# EAGLE board Sensorenschakeling_PCB (EAGLE 9.7.0)
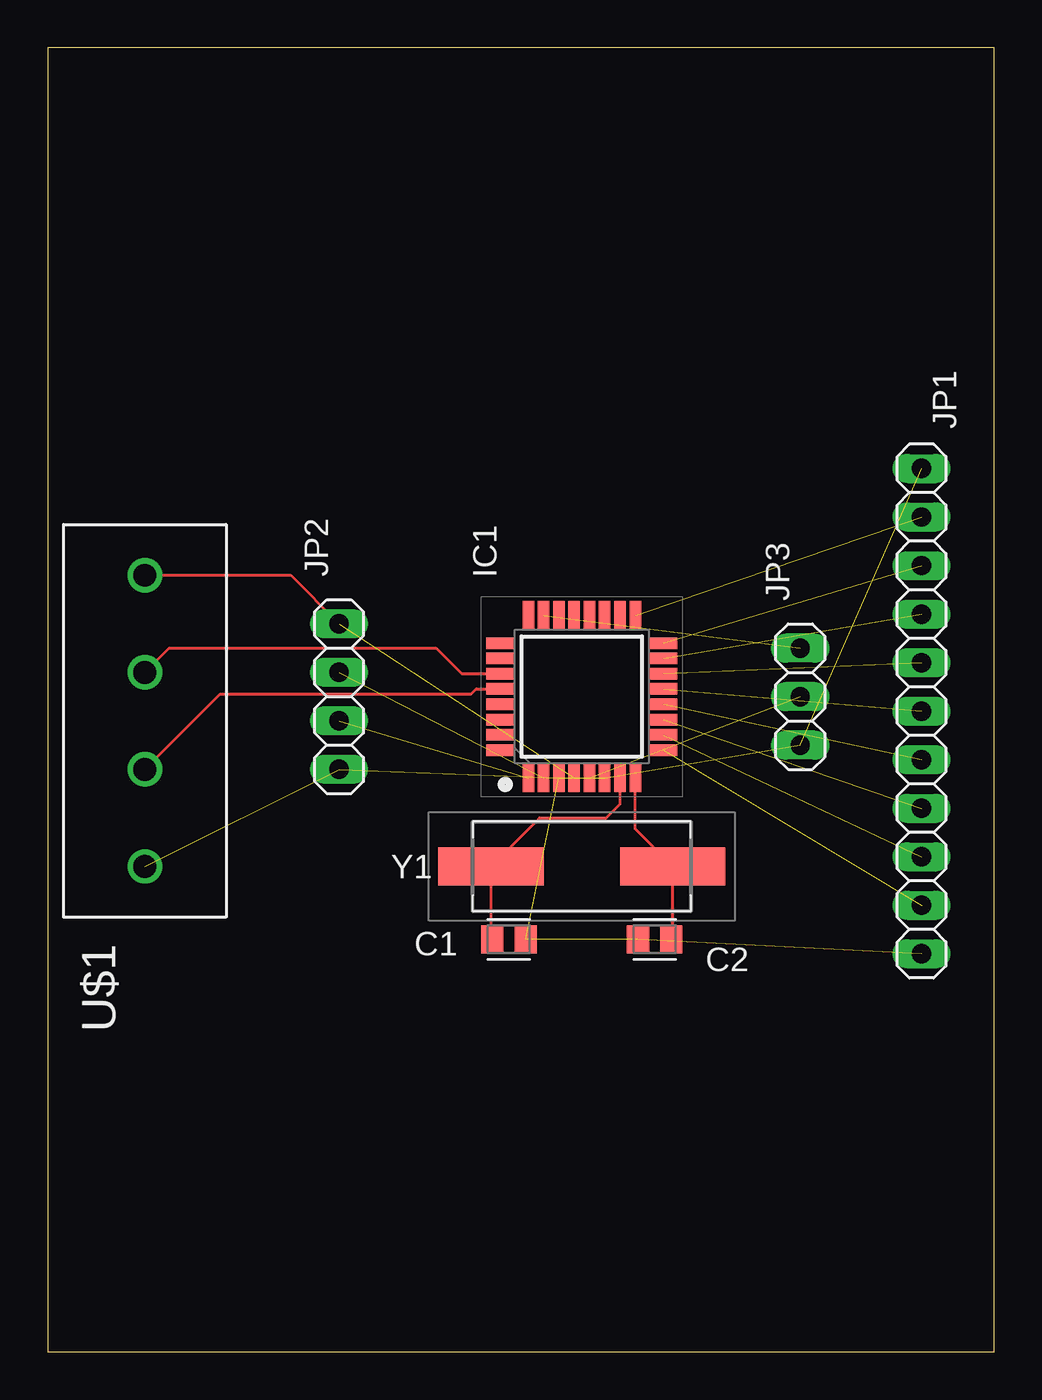
[diagram p0: board, top side]

Size 49.51 x 68.25 mm. Coordinates in mm from the lower left corner, seen from the top.
Outline: 0,0 49.51,0 49.51,68.25 0,68.25 0,0
Copper layers (1*16): Top 0.035mm / dielectric 1.5mm / Bottom 0.035mm
Design rules "default": minimum track width 6mil, minimum drill 0.35mm, track to track 6mil, track to pad 6mil, pad to pad 6mil, via to via 6mil, smd to smd 6mil, copper to edge 40mil, drill to drill 6mil, minimum pad ring 10mil, minimum via ring 8mil, stop-mask expansion 4mil, vias tented up to drill 0mil, thermal gap 10mil

## Footprints (pad centres in the part's own frame; a part is rotated, then mirrored left to right if it is on the bottom)
CAPC2012X110 = smd 1.165 x 1.465: 1 -0.875,0; 2 0.875,0
QFP80P900X900X120-32N = smd 1.5 x 0.6: 1 -4.25,2.8; 2 -4.25,2; 3 -4.25,1.2; 4 -4.25,0.4; 5 -4.25,-0.4; 6 -4.25,-1.2; 7 -4.25,-2; 8 -4.25,-2.8; 17 4.25,-2.8; 18 4.25,-2; 19 4.25,-1.2; 20 4.25,-0.4; 21 4.25,0.4; 22 4.25,1.2; 23 4.25,2; 24 4.25,2.8 | smd 0.6 x 1.5: 9 -2.8,-4.25; 10 -2,-4.25; 11 -1.2,-4.25; 12 -0.4,-4.25; 13 0.4,-4.25; 14 1.2,-4.25; 15 2,-4.25; 16 2.8,-4.25; 25 2.8,4.25; 26 2,4.25; 27 1.2,4.25; 28 0.4,4.25; 29 -0.4,4.25; 30 -1.2,4.25; 31 -2,4.25; 32 -2.8,4.25
1X11 = drill 1.016 long: 1 -12.7,0; 2 -10.16,0; 3 -7.62,0; 4 -5.08,0; 5 -2.54,0; 6 0,0; 7 2.54,0; 8 5.08,0; 9 7.62,0; 10 10.16,0; 11 12.7,0
1X04 = drill 1.016 long: 1 -3.81,0; 2 -1.27,0; 3 1.27,0; 4 3.81,0
1X03 = drill 1.016 long: 1 -2.54,0; 2 0,0; 3 2.54,0
TERMBLK_508-4N = drill 1.2: 1 0,0; 2 5.08,0; 3 10.16,0; 4 15.24,0
HC49SM830506016ATF = smd 5.5 x 2: 1 -4.75,0; 2 4.75,0

## Placement (x,y rotation side)
C1  22p  [CAPC2012X110]  24.13,21.59 0 top
C2  22p  [CAPC2012X110]  31.75,21.59 180 top
IC1  ATMEGA328P-AN  [QFP80P900X900X120-32N]  27.94,34.29 90 top
JP1  PINHD-1X11  [1X11]  45.72,33.53 270 top
JP2  PINHD-1X4  [1X04]  15.24,34.29 90 top
JP3  PINHD-1X3  [1X03]  39.37,34.29 90 top
U$1  2828XX-4282837-4  [TERMBLK_508-4N]  5.08,25.4 90 top
Y1  HC49SM-8-30-50-60-16-ATF  [HC49SM830506016ATF]  27.94,25.4 180 top

## Library data of the parts
C1 C2 = Capacitor; CATEGORY: Capacitor
IC1 = ATMEGA328P-AN; ARROW_PART_NUMBER: ATMEGA328P-AN; ARROW_PRICE-STOCK: https://www.arrow.com/en/products/atmega328p-an/microchip-technology?region=nac; DESCRIPTION: MCU 8-bit ATmega AVR RISC 32KB Flash Atmel ATMEGA328P-AN, 8bit AVR Microcontroller, 20MHz, 32 kB Flash, 32-Pin TQFP; HEIGHT: 1.2mm; MANUFACTURER_NAME: Microchip; MANUFACTURER_PART_NUMBER: ATMEGA328P-AN; MOUSER_PART_NUMBER: 556-ATMEGA328P-AN; MOUSER_PRICE-STOCK: https://www.mouser.co.uk/ProductDetail/Microchip-Technology-Atmel/ATMEGA328P-AN?qs=6Dg1WZIWLC6WK556tw8xAw%3D%3D
JP1-JP3 = Connector; CATEGORY: CONNECTOR; SUB-CATEGORY: PIN-HEADER
U$1 = Connector; CATEGORY: Connector; DESCRIPTION: TERM BLK 4P SIDE ENT 5.08mm PCB; MANUFACTURER: TE Connectivity; MPN: 282837-4; OPERATING_TEMPERATURE: 40°C to +105°C; PART_STATUS: Active; ROHS_COMPLIANCE: RoHS Compliant; SERIES: 283737; SUBCATEGORY: Terminal Block; TYPE: Side Wire Entry
Y1 = HC49SM-8-30-50-60-16-ATF; DESCRIPTION: MULTICOMP - HC49SM-8-30-50-60-16-ATF - CRYSTAL, 8MHZ, 16PF, SMD; HEIGHT: 4mm; MANUFACTURER_NAME: MULTICOMP; MANUFACTURER_PART_NUMBER: HC49SM-8-30-50-60-16-ATF

## Nets
D1: IC1.17 JP1.2
D2: IC1.16 JP1.3
D3: IC1.15 JP1.4
D4: IC1.14 JP1.5
D5: IC1.13 JP1.6
D6: IC1.12 JP1.7
D7: IC1.11 JP1.8
D8: IC1.10 JP1.9
ECHO: IC1.1 JP2.2
GND: C1.2 C2.2 IC1.3 IC1.5 JP1.11 JP2.1 JP3.2 U$1.1
IR: IC1.9 JP1.10
N$1: C1.1 IC1.7 Y1.2
N$2: C2.1 IC1.8 Y1.1
SCL: IC1.28 U$1.2
SDA: IC1.27 U$1.3
TRIG: IC1.2 JP2.3
VCC: IC1.4 IC1.6 JP1.1 JP2.4 JP3.1 U$1.4
VOUT: IC1.23 JP3.3

## Tracks (layer width: path | path; a pad name or v marks a point on that pad's centre or on a via)
D1  (1 unrouted)
D2  (1 unrouted)
D3  (1 unrouted)
D4  (1 unrouted)
D5  (1 unrouted)
D6  (1 unrouted)
D7  (1 unrouted)
D8  (1 unrouted)
ECHO  (1 unrouted)
GND  (7 unrouted)
IR  (1 unrouted)
N$1
  Top 0.152: IC1.7 29.94,28.67 29.21,27.94 25.73,27.94 Y1.2 23.19,21.66 C1.1
N$2
  Top 0.152: IC1.8 30.74,27.35 Y1.1 32.69,21.66 C2.1
SCL
  Top 0.152: IC1.28 22.42,34.69 22.15,34.42 9.02,34.42 U$1.2
SDA
  Top 0.152: U$1.3 6.35,36.83 20.32,36.83 21.66,35.49 IC1.27
TRIG  (1 unrouted)
VCC  (4 unrouted)
  Top 0.152: U$1.4 12.7,40.64 JP2.4
VOUT  (1 unrouted)